# EAGLE board SparkFun_Bluetooth_Beacon_IN100-Panel (EAGLE 9.6.2)
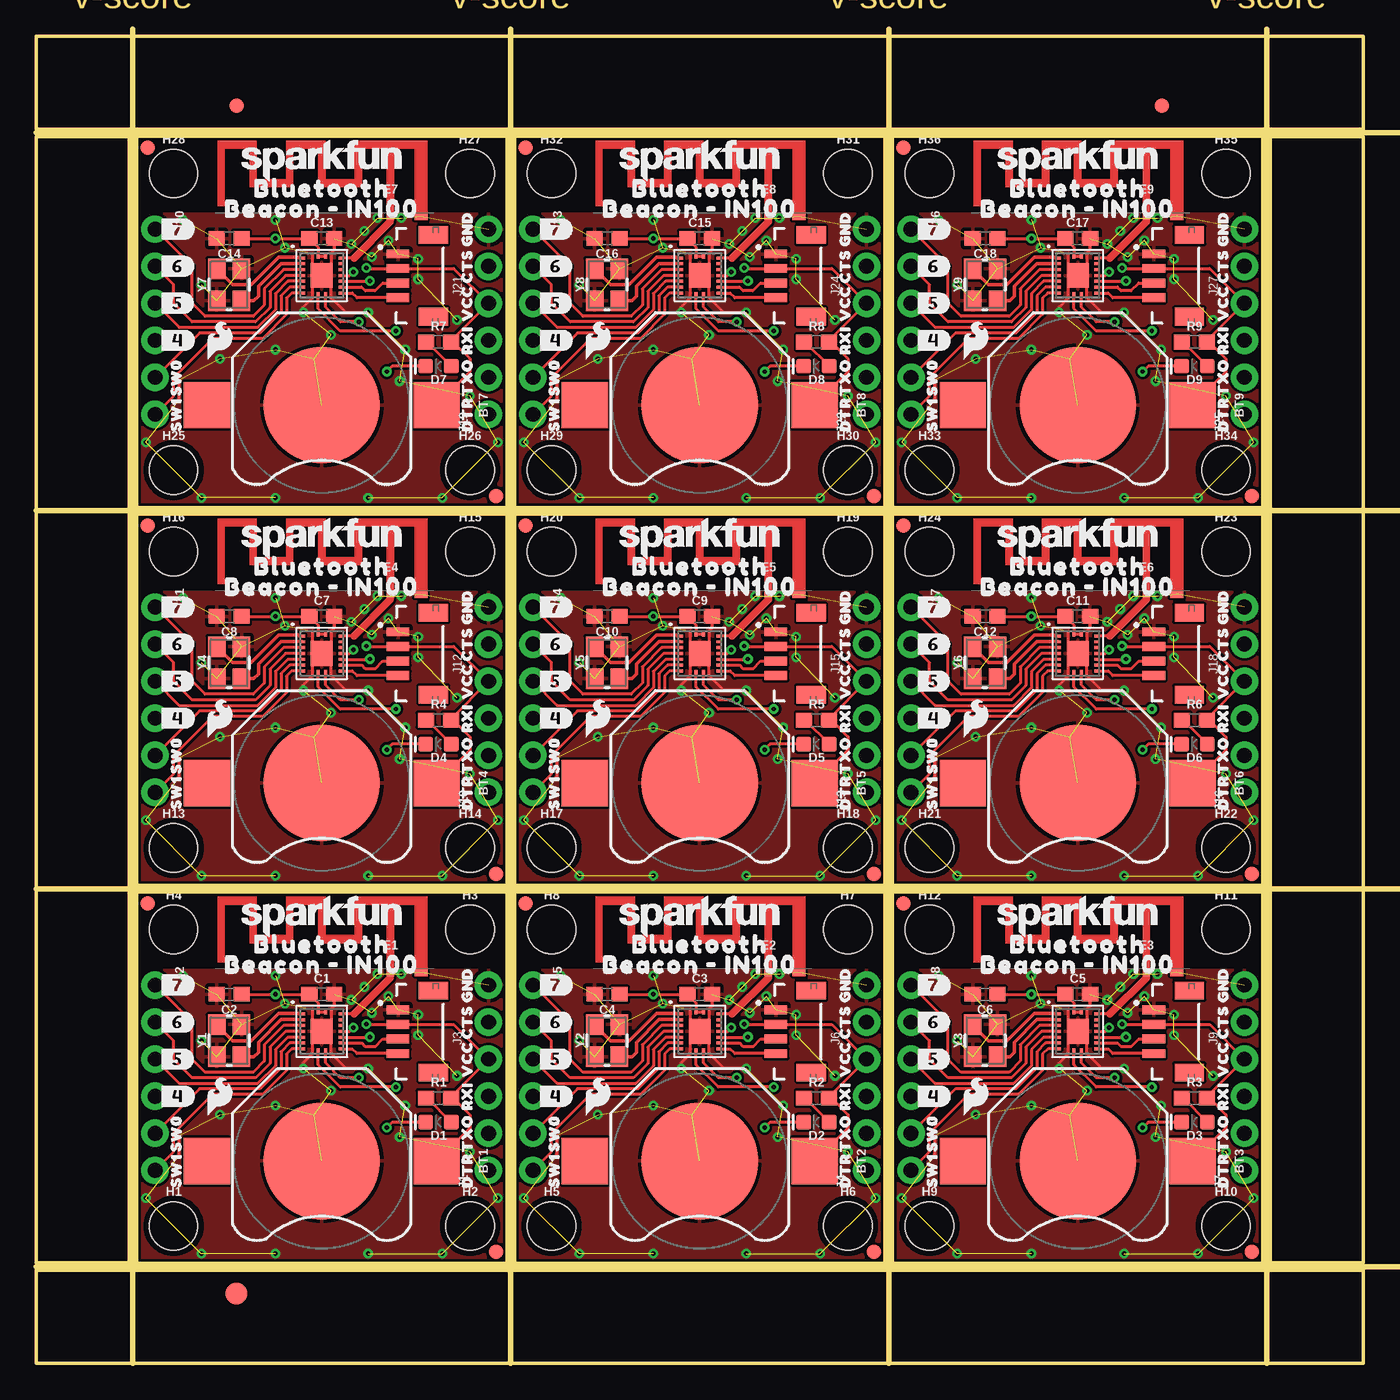
[diagram p0: board, top side]
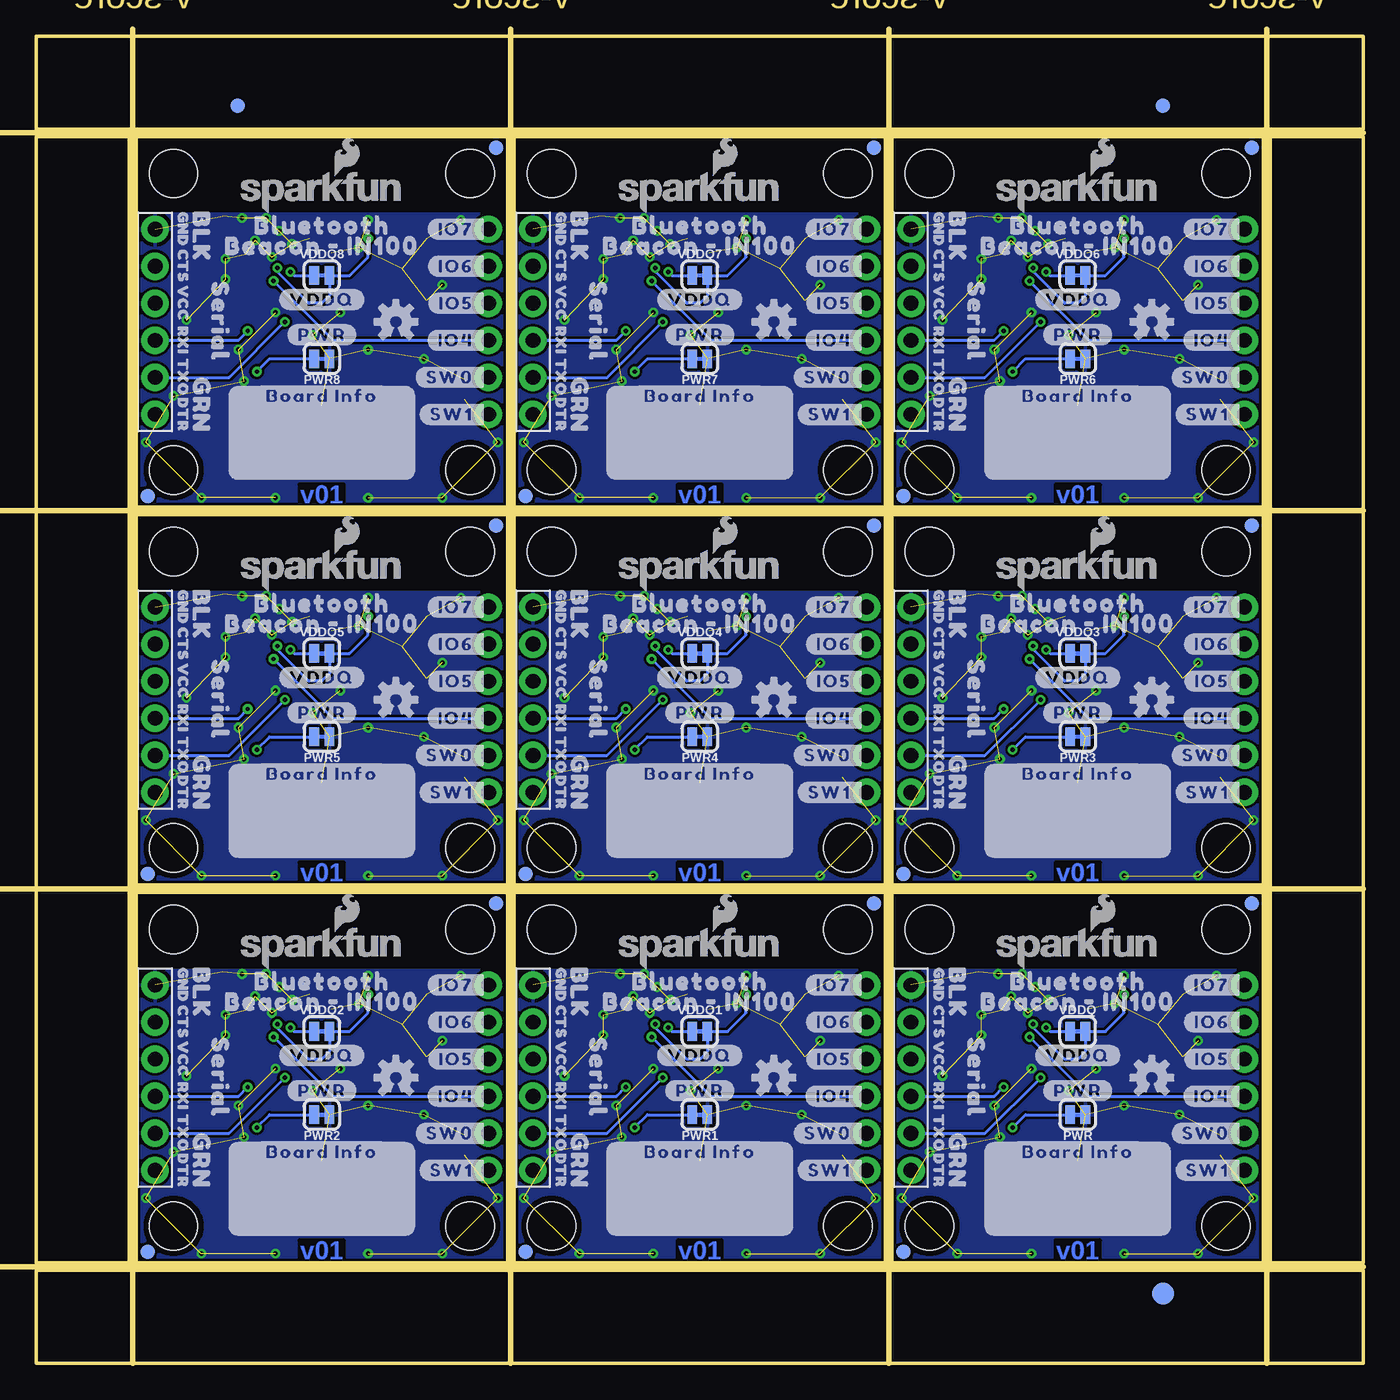
[diagram p1: board, bottom side, seen from below]

Size 90.93 x 90.93 mm. Coordinates in mm from the lower left corner, seen from the top.
Outline: 6.86,6.86 32.26,6.86 32.26,32.26 6.86,32.26 6.86,6.86
Outline: 32.77,6.86 58.17,6.86 58.17,32.26 32.77,32.26 32.77,6.86
Outline: 58.67,6.86 84.07,6.86 84.07,32.26 58.67,32.26 58.67,6.86
Outline: 6.86,32.77 32.26,32.77 32.26,58.17 6.86,58.17 6.86,32.77
Outline: 32.77,32.77 58.17,32.77 58.17,58.17 32.77,58.17 32.77,32.77
Outline: 58.67,32.77 84.07,32.77 84.07,58.17 58.67,58.17 58.67,32.77
Outline: 6.86,58.67 32.26,58.67 32.26,84.07 6.86,84.07 6.86,58.67
Outline: 32.77,58.67 58.17,58.67 58.17,84.07 32.77,84.07 32.77,58.67
Outline: 58.67,58.67 84.07,58.67 84.07,84.07 58.67,84.07 58.67,58.67
Outline: 0,6.35 90.93,6.35 90.93,0 0,0 0,6.35
Outline: 84.58,84.07 90.93,84.07 90.93,6.86 84.58,6.86 84.58,84.07
Outline: 0,90.93 90.93,90.93 90.93,84.58 0,84.58 0,90.93
Outline: 0,84.07 6.35,84.07 6.35,6.86 0,6.86 0,84.07
Copper layers (1*16): Top 0.035mm / dielectric 1.5mm / Bottom 0.035mm
Design rules "SparkFun_Bluetooth_Beacon_IN100": minimum track width 7mil, minimum drill 0.3mm, track to track 7mil, track to pad 7mil, pad to pad 7mil, via to via 7mil, smd to smd 7mil, copper to edge 7mil, drill to drill 7mil, minimum pad ring 7mil, minimum via ring 7mil, stop-mask expansion 3mil, vias tented up to drill 25mil, thermal gap 10mil
Milling: 8 lines

## Footprints (pad centres in the part's own frame; a part is rotated, then mirrored left to right if it is on the bottom)
BATTCON_12MM = smd 8 x 8: GND 0,0 | smd 3.175 x 3.175: PWR@1 -7.874,0; PWR@2 7.874,0
0603 = smd 1.1 x 1: 1 -0.85,0; 2 0.85,0
LED-0603 = smd 1 x 1: A -0.877,0; C 0.877,0
TRACE_ANTENNA_2.4GHZ_15.2MM = smd 0.5 x 0.5: ANT 0,-0.25 | smd 0.9 x 0.5: GND 2.1,-0.25
FIDUCIAL-1X2 = smd 1 x 1: 1 0,0
FIDUCIAL-1.5X3 = smd 1.5 x 1.5: 1 0,0
STAND-OFF = hole 3.302: 0,0
1X06_NO_SILK = drill 1.016 pad 1.88: 1 0,0; 2 2.54,0; 3 5.08,0; 4 7.62,0; 5 10.16,0; 6 12.7,0
JST04_1MM_VERT = smd 0.6 x 1.55: 1 -1.478,0.775; 2 -0.478,0.775; 3 0.522,0.775; 4 1.522,0.775 | smd 1.2 x 2: NC1 -2.778,3.2; NC2 2.822,3.2
SMT-JUMPER_2_NC_TRACE_SILK = smd 0.66 x 1.27: 1 -0.521,0; 2 0.521,0
IN100 = smd 0.35 x 0.2: 1 -1.325,1.2; 2 -1.325,0.8; 3 -1.325,0.4; 4 -1.325,0; 5 -1.325,-0.4; 6 -1.325,-0.8; 7 -1.325,-1.2; 10 1.325,-1.2; 11 1.325,-0.8; 12 1.325,-0.4; 13 1.325,0; 14 1.325,0.4; 15 1.325,0.8; 16 1.325,1.2 | smd 0.2 x 0.35: 8 -0.25,-1.325; 9 0.25,-1.325; 17 0.25,1.325; 18 -0.25,1.325 | smd 1.5 x 1.7: 19 0,0
CRYSTAL-SMD-3.2X2.5MM = smd 1.4 x 1.2: 1 -1.1,-0.85; 2 1.1,-0.85; 3 1.1,0.85; 4 -1.1,0.85

## Placement (x,y rotation side)
BT1  [BATTCON_12MM]  19.56,13.84 180 top
BT2  [BATTCON_12MM]  45.47,13.84 180 top
BT3  [BATTCON_12MM]  71.37,13.84 180 top
BT4  [BATTCON_12MM]  19.56,39.75 180 top
BT5  [BATTCON_12MM]  45.47,39.75 180 top
BT6  [BATTCON_12MM]  71.37,39.75 180 top
BT7  [BATTCON_12MM]  19.56,65.66 180 top
BT8  [BATTCON_12MM]  45.47,65.66 180 top
BT9  [BATTCON_12MM]  71.37,65.66 180 top
C1  0.1uF  [0603]  19.56,25.27 0 top
C2  10uF  [0603]  13.21,25.27 180 top
C3  0.1uF  [0603]  45.47,25.27 0 top
C4  10uF  [0603]  39.12,25.27 180 top
C5  0.1uF  [0603]  71.37,25.27 0 top
C6  10uF  [0603]  65.02,25.27 180 top
C7  0.1uF  [0603]  19.56,51.18 0 top
C8  10uF  [0603]  13.21,51.18 180 top
C9  0.1uF  [0603]  45.47,51.18 0 top
C10  10uF  [0603]  39.12,51.18 180 top
C11  0.1uF  [0603]  71.37,51.18 0 top
C12  10uF  [0603]  65.02,51.18 180 top
C13  0.1uF  [0603]  19.56,77.09 0 top
C14  10uF  [0603]  13.21,77.09 180 top
C15  0.1uF  [0603]  45.47,77.09 0 top
C16  10uF  [0603]  39.12,77.09 180 top
C17  0.1uF  [0603]  71.37,77.09 0 top
C18  10uF  [0603]  65.02,77.09 180 top
D1  RED  [LED-0603]  27.56,16.51 180 top
D2  RED  [LED-0603]  53.47,16.51 180 top
D3  RED  [LED-0603]  79.38,16.51 180 top
D4  RED  [LED-0603]  27.56,42.42 180 top
D5  RED  [LED-0603]  53.47,42.42 180 top
D6  RED  [LED-0603]  79.38,42.42 180 top
D7  RED  [LED-0603]  27.56,68.33 180 top
D8  RED  [LED-0603]  53.47,68.33 180 top
D9  RED  [LED-0603]  79.38,68.33 180 top
E1  ANTENNA-GROUNDEDTRACE-15.2MM  [TRACE_ANTENNA_2.4GHZ_15.2MM]  24.26,27.05 0 top
E2  ANTENNA-GROUNDEDTRACE-15.2MM  [TRACE_ANTENNA_2.4GHZ_15.2MM]  50.16,27.05 0 top
E3  ANTENNA-GROUNDEDTRACE-15.2MM  [TRACE_ANTENNA_2.4GHZ_15.2MM]  76.07,27.05 0 top
E4  ANTENNA-GROUNDEDTRACE-15.2MM  [TRACE_ANTENNA_2.4GHZ_15.2MM]  24.26,52.96 0 top
E5  ANTENNA-GROUNDEDTRACE-15.2MM  [TRACE_ANTENNA_2.4GHZ_15.2MM]  50.16,52.96 0 top
E6  ANTENNA-GROUNDEDTRACE-15.2MM  [TRACE_ANTENNA_2.4GHZ_15.2MM]  76.07,52.96 0 top
E7  ANTENNA-GROUNDEDTRACE-15.2MM  [TRACE_ANTENNA_2.4GHZ_15.2MM]  24.26,78.87 0 top
E8  ANTENNA-GROUNDEDTRACE-15.2MM  [TRACE_ANTENNA_2.4GHZ_15.2MM]  50.16,78.87 0 top
E9  ANTENNA-GROUNDEDTRACE-15.2MM  [TRACE_ANTENNA_2.4GHZ_15.2MM]  76.07,78.87 0 top
E$1  [FIDUCIAL-1X2]  13.72,86.17 0 top
E$2  [FIDUCIAL-1X2]  13.72,86.17 0 bottom
E$3  [FIDUCIAL-1X2]  77.15,86.17 0 top
E$4  [FIDUCIAL-1X2]  77.15,86.17 0 bottom
E$5  [FIDUCIAL-1.5X3]  13.72,4.76 0 top
E$6  [FIDUCIAL-1.5X3]  13.72,4.76 0 bottom
FD1  FIDUCIAL1X2  [FIDUCIAL-1X2]  7.62,31.5 0 bottom
FD2  FIDUCIAL1X2  [FIDUCIAL-1X2]  7.62,31.5 0 top
FD3  FIDUCIAL1X2  [FIDUCIAL-1X2]  31.5,7.62 0 bottom
FD4  FIDUCIAL1X2  [FIDUCIAL-1X2]  31.5,7.62 0 top
FD5  FIDUCIAL1X2  [FIDUCIAL-1X2]  33.53,31.5 0 bottom
FD6  FIDUCIAL1X2  [FIDUCIAL-1X2]  33.53,31.5 0 top
FD7  FIDUCIAL1X2  [FIDUCIAL-1X2]  57.4,7.62 0 bottom
FD8  FIDUCIAL1X2  [FIDUCIAL-1X2]  57.4,7.62 0 top
FD9  FIDUCIAL1X2  [FIDUCIAL-1X2]  59.44,31.5 0 bottom
FD10  FIDUCIAL1X2  [FIDUCIAL-1X2]  59.44,31.5 0 top
FD11  FIDUCIAL1X2  [FIDUCIAL-1X2]  83.31,7.62 0 bottom
FD12  FIDUCIAL1X2  [FIDUCIAL-1X2]  83.31,7.62 0 top
FD13  FIDUCIAL1X2  [FIDUCIAL-1X2]  7.62,57.4 0 bottom
FD14  FIDUCIAL1X2  [FIDUCIAL-1X2]  7.62,57.4 0 top
FD15  FIDUCIAL1X2  [FIDUCIAL-1X2]  31.5,33.53 0 bottom
FD16  FIDUCIAL1X2  [FIDUCIAL-1X2]  31.5,33.53 0 top
FD17  FIDUCIAL1X2  [FIDUCIAL-1X2]  33.53,57.4 0 bottom
FD18  FIDUCIAL1X2  [FIDUCIAL-1X2]  33.53,57.4 0 top
FD19  FIDUCIAL1X2  [FIDUCIAL-1X2]  57.4,33.53 0 bottom
FD20  FIDUCIAL1X2  [FIDUCIAL-1X2]  57.4,33.53 0 top
FD21  FIDUCIAL1X2  [FIDUCIAL-1X2]  59.44,57.4 0 bottom
FD22  FIDUCIAL1X2  [FIDUCIAL-1X2]  59.44,57.4 0 top
FD23  FIDUCIAL1X2  [FIDUCIAL-1X2]  83.31,33.53 0 bottom
FD24  FIDUCIAL1X2  [FIDUCIAL-1X2]  83.31,33.53 0 top
FD25  FIDUCIAL1X2  [FIDUCIAL-1X2]  7.62,83.31 0 bottom
FD26  FIDUCIAL1X2  [FIDUCIAL-1X2]  7.62,83.31 0 top
FD27  FIDUCIAL1X2  [FIDUCIAL-1X2]  31.5,59.44 0 bottom
FD28  FIDUCIAL1X2  [FIDUCIAL-1X2]  31.5,59.44 0 top
FD29  FIDUCIAL1X2  [FIDUCIAL-1X2]  33.53,83.31 0 bottom
FD30  FIDUCIAL1X2  [FIDUCIAL-1X2]  33.53,83.31 0 top
FD31  FIDUCIAL1X2  [FIDUCIAL-1X2]  57.4,59.44 0 bottom
FD32  FIDUCIAL1X2  [FIDUCIAL-1X2]  57.4,59.44 0 top
FD33  FIDUCIAL1X2  [FIDUCIAL-1X2]  59.44,83.31 0 bottom
FD34  FIDUCIAL1X2  [FIDUCIAL-1X2]  59.44,83.31 0 top
FD35  FIDUCIAL1X2  [FIDUCIAL-1X2]  83.31,59.44 0 bottom
FD36  FIDUCIAL1X2  [FIDUCIAL-1X2]  83.31,59.44 0 top
H1  STAND-OFF  [STAND-OFF]  9.4,9.4 0 top
H2  STAND-OFF  [STAND-OFF]  29.72,9.4 0 top
H3  STAND-OFF  [STAND-OFF]  29.72,29.72 0 top
H4  STAND-OFF  [STAND-OFF]  9.4,29.72 0 top
H5  STAND-OFF  [STAND-OFF]  35.31,9.4 0 top
H6  STAND-OFF  [STAND-OFF]  55.63,9.4 0 top
H7  STAND-OFF  [STAND-OFF]  55.63,29.72 0 top
H8  STAND-OFF  [STAND-OFF]  35.31,29.72 0 top
H9  STAND-OFF  [STAND-OFF]  61.21,9.4 0 top
H10  STAND-OFF  [STAND-OFF]  81.53,9.4 0 top
H11  STAND-OFF  [STAND-OFF]  81.53,29.72 0 top
H12  STAND-OFF  [STAND-OFF]  61.21,29.72 0 top
H13  STAND-OFF  [STAND-OFF]  9.4,35.31 0 top
H14  STAND-OFF  [STAND-OFF]  29.72,35.31 0 top
H15  STAND-OFF  [STAND-OFF]  29.72,55.63 0 top
H16  STAND-OFF  [STAND-OFF]  9.4,55.63 0 top
H17  STAND-OFF  [STAND-OFF]  35.31,35.31 0 top
H18  STAND-OFF  [STAND-OFF]  55.63,35.31 0 top
H19  STAND-OFF  [STAND-OFF]  55.63,55.63 0 top
H20  STAND-OFF  [STAND-OFF]  35.31,55.63 0 top
H21  STAND-OFF  [STAND-OFF]  61.21,35.31 0 top
H22  STAND-OFF  [STAND-OFF]  81.53,35.31 0 top
H23  STAND-OFF  [STAND-OFF]  81.53,55.63 0 top
H24  STAND-OFF  [STAND-OFF]  61.21,55.63 0 top
H25  STAND-OFF  [STAND-OFF]  9.4,61.21 0 top
H26  STAND-OFF  [STAND-OFF]  29.72,61.21 0 top
H27  STAND-OFF  [STAND-OFF]  29.72,81.53 0 top
H28  STAND-OFF  [STAND-OFF]  9.4,81.53 0 top
H29  STAND-OFF  [STAND-OFF]  35.31,61.21 0 top
H30  STAND-OFF  [STAND-OFF]  55.63,61.21 0 top
H31  STAND-OFF  [STAND-OFF]  55.63,81.53 0 top
H32  STAND-OFF  [STAND-OFF]  35.31,81.53 0 top
H33  STAND-OFF  [STAND-OFF]  61.21,61.21 0 top
H34  STAND-OFF  [STAND-OFF]  81.53,61.21 0 top
H35  STAND-OFF  [STAND-OFF]  81.53,81.53 0 top
H36  STAND-OFF  [STAND-OFF]  61.21,81.53 0 top
J1  [1X06_NO_SILK]  30.99,13.21 90 top
J2  [1X06_NO_SILK]  8.13,25.91 270 top
J3  Vertical Qwiic Connector  [JST04_1MM_VERT]  24,22.73 270 top
J4  [1X06_NO_SILK]  56.9,13.21 90 top
J5  [1X06_NO_SILK]  34.04,25.91 270 top
J6  Vertical Qwiic Connector  [JST04_1MM_VERT]  49.91,22.73 270 top
J7  [1X06_NO_SILK]  82.8,13.21 90 top
J8  [1X06_NO_SILK]  59.94,25.91 270 top
J9  Vertical Qwiic Connector  [JST04_1MM_VERT]  75.82,22.73 270 top
J10  [1X06_NO_SILK]  30.99,39.12 90 top
J11  [1X06_NO_SILK]  8.13,51.82 270 top
J12  Vertical Qwiic Connector  [JST04_1MM_VERT]  24,48.64 270 top
J13  [1X06_NO_SILK]  56.9,39.12 90 top
J14  [1X06_NO_SILK]  34.04,51.82 270 top
J15  Vertical Qwiic Connector  [JST04_1MM_VERT]  49.91,48.64 270 top
J16  [1X06_NO_SILK]  82.8,39.12 90 top
J17  [1X06_NO_SILK]  59.94,51.82 270 top
J18  Vertical Qwiic Connector  [JST04_1MM_VERT]  75.82,48.64 270 top
J19  [1X06_NO_SILK]  30.99,65.02 90 top
J20  [1X06_NO_SILK]  8.13,77.72 270 top
J21  Vertical Qwiic Connector  [JST04_1MM_VERT]  24,74.55 270 top
J22  [1X06_NO_SILK]  56.9,65.02 90 top
J23  [1X06_NO_SILK]  34.04,77.72 270 top
J24  Vertical Qwiic Connector  [JST04_1MM_VERT]  49.91,74.55 270 top
J25  [1X06_NO_SILK]  82.8,65.02 90 top
J26  [1X06_NO_SILK]  59.94,77.72 270 top
J27  Vertical Qwiic Connector  [JST04_1MM_VERT]  75.82,74.55 270 top
LOGO1  OSHW-LOGOS  [OSHW-LOGO-S]  14.48,19.56 0 bottom
LOGO2  SFE_LOGO_NAME_FLAME.1_INCH  [SFE_LOGO_NAME_FLAME_.1]  19.56,28.45 0 bottom
LOGO3  OSHW-LOGOS  [OSHW-LOGO-S]  40.39,19.56 0 bottom
LOGO4  SFE_LOGO_NAME_FLAME.1_INCH  [SFE_LOGO_NAME_FLAME_.1]  45.47,28.45 0 bottom
LOGO5  OSHW-LOGOS  [OSHW-LOGO-S]  66.29,19.56 0 bottom
LOGO6  SFE_LOGO_NAME_FLAME.1_INCH  [SFE_LOGO_NAME_FLAME_.1]  71.37,28.45 0 bottom
LOGO7  OSHW-LOGOS  [OSHW-LOGO-S]  14.48,45.47 0 bottom
LOGO8  SFE_LOGO_NAME_FLAME.1_INCH  [SFE_LOGO_NAME_FLAME_.1]  19.56,54.36 0 bottom
LOGO9  OSHW-LOGOS  [OSHW-LOGO-S]  40.39,45.47 0 bottom
LOGO10  SFE_LOGO_NAME_FLAME.1_INCH  [SFE_LOGO_NAME_FLAME_.1]  45.47,54.36 0 bottom
LOGO11  OSHW-LOGOS  [OSHW-LOGO-S]  66.29,45.47 0 bottom
LOGO12  SFE_LOGO_NAME_FLAME.1_INCH  [SFE_LOGO_NAME_FLAME_.1]  71.37,54.36 0 bottom
LOGO13  OSHW-LOGOS  [OSHW-LOGO-S]  14.48,71.37 0 bottom
LOGO14  SFE_LOGO_NAME_FLAME.1_INCH  [SFE_LOGO_NAME_FLAME_.1]  19.56,80.26 0 bottom
LOGO15  OSHW-LOGOS  [OSHW-LOGO-S]  40.39,71.37 0 bottom
LOGO16  SFE_LOGO_NAME_FLAME.1_INCH  [SFE_LOGO_NAME_FLAME_.1]  45.47,80.26 0 bottom
LOGO17  OSHW-LOGOS  [OSHW-LOGO-S]  66.29,71.37 0 bottom
LOGO18  SFE_LOGO_NAME_FLAME.1_INCH  [SFE_LOGO_NAME_FLAME_.1]  71.37,80.26 0 bottom
PWR  JUMPER-SMT_2_NC_TRACE_SILK  [SMT-JUMPER_2_NC_TRACE_SILK]  19.56,17.02 180 bottom
PWR1  JUMPER-SMT_2_NC_TRACE_SILK  [SMT-JUMPER_2_NC_TRACE_SILK]  45.47,17.02 180 bottom
PWR2  JUMPER-SMT_2_NC_TRACE_SILK  [SMT-JUMPER_2_NC_TRACE_SILK]  71.37,17.02 180 bottom
PWR3  JUMPER-SMT_2_NC_TRACE_SILK  [SMT-JUMPER_2_NC_TRACE_SILK]  19.56,42.93 180 bottom
PWR4  JUMPER-SMT_2_NC_TRACE_SILK  [SMT-JUMPER_2_NC_TRACE_SILK]  45.47,42.93 180 bottom
PWR5  JUMPER-SMT_2_NC_TRACE_SILK  [SMT-JUMPER_2_NC_TRACE_SILK]  71.37,42.93 180 bottom
PWR6  JUMPER-SMT_2_NC_TRACE_SILK  [SMT-JUMPER_2_NC_TRACE_SILK]  19.56,68.83 180 bottom
PWR7  JUMPER-SMT_2_NC_TRACE_SILK  [SMT-JUMPER_2_NC_TRACE_SILK]  45.47,68.83 180 bottom
PWR8  JUMPER-SMT_2_NC_TRACE_SILK  [SMT-JUMPER_2_NC_TRACE_SILK]  71.37,68.83 180 bottom
R1  1k  [0603]  27.56,18.16 0 top
R2  1k  [0603]  53.47,18.16 0 top
R3  1k  [0603]  79.38,18.16 0 top
R4  1k  [0603]  27.56,44.07 0 top
R5  1k  [0603]  53.47,44.07 0 top
R6  1k  [0603]  79.38,44.07 0 top
R7  1k  [0603]  27.56,69.98 0 top
R8  1k  [0603]  53.47,69.98 0 top
R9  1k  [0603]  79.38,69.98 0 top
U1  IN100  [IN100]  19.56,22.73 0 top
U2  IN100  [IN100]  45.47,22.73 0 top
U3  IN100  [IN100]  71.37,22.73 0 top
U4  IN100  [IN100]  19.56,48.64 0 top
U5  IN100  [IN100]  45.47,48.64 0 top
U6  IN100  [IN100]  71.37,48.64 0 top
U7  IN100  [IN100]  19.56,74.55 0 top
U8  IN100  [IN100]  45.47,74.55 0 top
U9  IN100  [IN100]  71.37,74.55 0 top
U$1  [BLUETOOTH0]  19.56,28.7 0 top
U$2  [#_7#0]  8.25,25.91 0 top
U$3  [#_6#0]  8.25,23.37 0 top
U$4  [SFE_LOGO_NAME_.1]  19.56,30.61 0 top
U$5  [BEACON_#_IN1000]  19.56,27.3 0 top
U$6  [#_5#0]  8.25,20.83 0 top
U$7  [#_4#0]  8.25,18.29 0 top
U$8  [SFE_LOGO_FLAME_.1]  12.57,18.29 0 top
U$9  [BLUETOOTH0]  19.56,26.16 0 bottom
U$10  [BEACON_#_IN1000]  19.56,24.77 0 bottom
U$11  [#VDDQ#0]  19.56,21.08 0 bottom
U$12  [SERIAL0]  26.54,19.56 270 bottom
U$13  [#IO7_#0]  8.13,25.91 0 bottom
U$14  [#IO6_#0]  8.13,23.37 0 bottom
U$15  [#IO5_#0]  8.13,20.83 0 bottom
U$16  [#IO4_#0]  8.13,18.29 0 bottom
U$17  [#SW0_#0]  8.13,15.75 0 bottom
U$18  [#SW1_#0]  8.13,13.21 0 bottom
U$19  [#PWR#0]  19.56,18.67 0 bottom
U$20  [BLUETOOTH0]  45.47,28.7 0 top
U$21  [SW00]  9.59,15.75 90 top
U$22  [SW10]  9.59,13.21 90 top
U$23  [#BOARD_INFO#0]  19.56,14.48 0 bottom
U$24  [SFE_LOGO_NAME_.1]  45.47,30.61 0 top
U$25  [BEACON_#_IN1000]  45.47,27.3 0 top
U$26  [#_7#0]  34.16,25.91 0 top
U$27  [#_6#0]  34.16,23.37 0 top
U$28  [#_5#0]  34.16,20.83 0 top
U$29  [#_4#0]  34.16,18.29 0 top
U$30  [SFE_LOGO_FLAME_.1]  38.48,18.29 0 top
U$31  [BLUETOOTH0]  45.47,26.16 0 bottom
U$32  [BEACON_#_IN1000]  45.47,24.77 0 bottom
U$33  [#VDDQ#0]  45.47,21.08 0 bottom
U$34  [SERIAL0]  52.45,19.56 270 bottom
U$35  [#IO7_#0]  34.04,25.91 0 bottom
U$36  [#IO6_#0]  34.04,23.37 0 bottom
U$37  [#IO5_#0]  34.04,20.83 0 bottom
U$38  [#IO4_#0]  34.04,18.29 0 bottom
U$39  [#SW0_#0]  34.04,15.75 0 bottom
U$40  [#SW1_#0]  34.04,13.21 0 bottom
U$41  [#PWR#0]  45.47,18.67 0 bottom
U$42  [SW00]  35.5,15.75 90 top
U$43  [SW10]  35.5,13.21 90 top
U$44  [#BOARD_INFO#0]  45.47,14.48 0 bottom
U$45  [BLUETOOTH0]  71.37,28.7 0 top
U$46  [SFE_LOGO_NAME_.1]  71.37,30.61 0 top
U$47  [BEACON_#_IN1000]  71.37,27.3 0 top
U$48  [#_7#0]  60.07,25.91 0 top
U$49  [#_6#0]  60.07,23.37 0 top
U$50  [#_5#0]  60.07,20.83 0 top
U$51  [#_4#0]  60.07,18.29 0 top
U$52  [SFE_LOGO_FLAME_.1]  64.39,18.29 0 top
U$53  [BLUETOOTH0]  71.37,26.16 0 bottom
U$54  [BEACON_#_IN1000]  71.37,24.77 0 bottom
U$55  [#VDDQ#0]  71.37,21.08 0 bottom
U$56  [SERIAL0]  78.36,19.56 270 bottom
U$57  [#IO7_#0]  59.94,25.91 0 bottom
U$58  [#IO6_#0]  59.94,23.37 0 bottom
U$59  [#IO5_#0]  59.94,20.83 0 bottom
U$60  [#IO4_#0]  59.94,18.29 0 bottom
U$61  [#SW0_#0]  59.94,15.75 0 bottom
U$62  [#SW1_#0]  59.94,13.21 0 bottom
U$63  [#PWR#0]  71.37,18.67 0 bottom
U$64  [SW00]  61.4,15.75 90 top
U$65  [SW10]  61.4,13.21 90 top
U$66  [#BOARD_INFO#0]  71.37,14.48 0 bottom
U$67  [BLUETOOTH0]  19.56,54.61 0 top
U$68  [SFE_LOGO_NAME_.1]  19.56,56.51 0 top
U$69  [BEACON_#_IN1000]  19.56,53.21 0 top
U$70  [#_7#0]  8.25,51.82 0 top
U$71  [#_6#0]  8.25,49.28 0 top
U$72  [#_5#0]  8.25,46.74 0 top
U$73  [#_4#0]  8.25,44.2 0 top
U$74  [SFE_LOGO_FLAME_.1]  12.57,44.2 0 top
U$75  [BLUETOOTH0]  19.56,52.07 0 bottom
U$76  [BEACON_#_IN1000]  19.56,50.67 0 bottom
U$77  [#VDDQ#0]  19.56,46.99 0 bottom
U$78  [SERIAL0]  26.54,45.47 270 bottom
U$79  [#IO7_#0]  8.13,51.82 0 bottom
U$80  [#IO6_#0]  8.13,49.28 0 bottom
U$81  [#IO5_#0]  8.13,46.74 0 bottom
U$82  [#IO4_#0]  8.13,44.2 0 bottom
U$83  [#SW0_#0]  8.13,41.66 0 bottom
U$84  [#SW1_#0]  8.13,39.12 0 bottom
U$85  [#PWR#0]  19.56,44.58 0 bottom
U$86  [SW00]  9.59,41.66 90 top
U$87  [SW10]  9.59,39.12 90 top
U$88  [#BOARD_INFO#0]  19.56,40.39 0 bottom
U$89  [BLUETOOTH0]  45.47,54.61 0 top
U$90  [SFE_LOGO_NAME_.1]  45.47,56.51 0 top
U$91  [BEACON_#_IN1000]  45.47,53.21 0 top
U$92  [#_7#0]  34.16,51.82 0 top
U$93  [#_6#0]  34.16,49.28 0 top
U$94  [#_5#0]  34.16,46.74 0 top
U$95  [#_4#0]  34.16,44.2 0 top
U$96  [SFE_LOGO_FLAME_.1]  38.48,44.2 0 top
U$97  [BLUETOOTH0]  45.47,52.07 0 bottom
U$98  [BEACON_#_IN1000]  45.47,50.67 0 bottom
U$99  [#VDDQ#0]  45.47,46.99 0 bottom
U$100  [SERIAL0]  52.45,45.47 270 bottom
U$101  [#IO7_#0]  34.04,51.82 0 bottom
U$102  [#IO6_#0]  34.04,49.28 0 bottom
U$103  [#IO5_#0]  34.04,46.74 0 bottom
U$104  [#IO4_#0]  34.04,44.2 0 bottom
U$105  [#SW0_#0]  34.04,41.66 0 bottom
U$106  [#SW1_#0]  34.04,39.12 0 bottom
U$107  [#PWR#0]  45.47,44.58 0 bottom
U$108  [SW00]  35.5,41.66 90 top
U$109  [SW10]  35.5,39.12 90 top
U$110  [#BOARD_INFO#0]  45.47,40.39 0 bottom
U$111  [BLUETOOTH0]  71.37,54.61 0 top
U$112  [SFE_LOGO_NAME_.1]  71.37,56.51 0 top
U$113  [BEACON_#_IN1000]  71.37,53.21 0 top
U$114  [#_7#0]  60.07,51.82 0 top
U$115  [#_6#0]  60.07,49.28 0 top
U$116  [#_5#0]  60.07,46.74 0 top
U$117  [#_4#0]  60.07,44.2 0 top
U$118  [SFE_LOGO_FLAME_.1]  64.39,44.2 0 top
U$119  [BLUETOOTH0]  71.37,52.07 0 bottom
U$120  [BEACON_#_IN1000]  71.37,50.67 0 bottom
U$121  [#VDDQ#0]  71.37,46.99 0 bottom
U$122  [SERIAL0]  78.36,45.47 270 bottom
U$123  [#IO7_#0]  59.94,51.82 0 bottom
U$124  [#IO6_#0]  59.94,49.28 0 bottom
U$125  [#IO5_#0]  59.94,46.74 0 bottom
U$126  [#IO4_#0]  59.94,44.2 0 bottom
U$127  [#SW0_#0]  59.94,41.66 0 bottom
U$128  [#SW1_#0]  59.94,39.12 0 bottom
U$129  [#PWR#0]  71.37,44.58 0 bottom
U$130  [SW00]  61.4,41.66 90 top
U$131  [SW10]  61.4,39.12 90 top
U$132  [#BOARD_INFO#0]  71.37,40.39 0 bottom
U$133  [BLUETOOTH0]  19.56,80.52 0 top
U$134  [SFE_LOGO_NAME_.1]  19.56,82.42 0 top
U$135  [BEACON_#_IN1000]  19.56,79.12 0 top
U$136  [#_7#0]  8.25,77.72 0 top
U$137  [#_6#0]  8.25,75.18 0 top
U$138  [#_5#0]  8.25,72.64 0 top
U$139  [#_4#0]  8.25,70.1 0 top
U$140  [SFE_LOGO_FLAME_.1]  12.57,70.1 0 top
U$141  [BLUETOOTH0]  19.56,77.98 0 bottom
U$142  [BEACON_#_IN1000]  19.56,76.58 0 bottom
U$143  [#VDDQ#0]  19.56,72.9 0 bottom
U$144  [SERIAL0]  26.54,71.37 270 bottom
U$145  [#IO7_#0]  8.13,77.72 0 bottom
U$146  [#IO6_#0]  8.13,75.18 0 bottom
U$147  [#IO5_#0]  8.13,72.64 0 bottom
U$148  [#IO4_#0]  8.13,70.1 0 bottom
U$149  [#SW0_#0]  8.13,67.56 0 bottom
U$150  [#SW1_#0]  8.13,65.02 0 bottom
U$151  [#PWR#0]  19.56,70.48 0 bottom
U$152  [SW00]  9.59,67.56 90 top
U$153  [SW10]  9.59,65.02 90 top
U$154  [#BOARD_INFO#0]  19.56,66.29 0 bottom
U$155  [BLUETOOTH0]  45.47,80.52 0 top
U$156  [SFE_LOGO_NAME_.1]  45.47,82.42 0 top
U$157  [BEACON_#_IN1000]  45.47,79.12 0 top
U$158  [#_7#0]  34.16,77.72 0 top
U$159  [#_6#0]  34.16,75.18 0 top
U$160  [#_5#0]  34.16,72.64 0 top
U$161  [#_4#0]  34.16,70.1 0 top
U$162  [SFE_LOGO_FLAME_.1]  38.48,70.1 0 top
U$163  [BLUETOOTH0]  45.47,77.98 0 bottom
U$164  [BEACON_#_IN1000]  45.47,76.58 0 bottom
U$165  [#VDDQ#0]  45.47,72.9 0 bottom
U$166  [SERIAL0]  52.45,71.37 270 bottom
U$167  [#IO7_#0]  34.04,77.72 0 bottom
U$168  [#IO6_#0]  34.04,75.18 0 bottom
U$169  [#IO5_#0]  34.04,72.64 0 bottom
U$170  [#IO4_#0]  34.04,70.1 0 bottom
U$171  [#SW0_#0]  34.04,67.56 0 bottom
U$172  [#SW1_#0]  34.04,65.02 0 bottom
U$173  [#PWR#0]  45.47,70.48 0 bottom
U$174  [SW00]  35.5,67.56 90 top
U$175  [SW10]  35.5,65.02 90 top
U$176  [#BOARD_INFO#0]  45.47,66.29 0 bottom
U$177  [BLUETOOTH0]  71.37,80.52 0 top
U$178  [SFE_LOGO_NAME_.1]  71.37,82.42 0 top
U$179  [BEACON_#_IN1000]  71.37,79.12 0 top
U$180  [#_7#0]  60.07,77.72 0 top
U$181  [#_6#0]  60.07,75.18 0 top
U$182  [#_5#0]  60.07,72.64 0 top
U$183  [#_4#0]  60.07,70.1 0 top
U$184  [SFE_LOGO_FLAME_.1]  64.39,70.1 0 top
U$185  [BLUETOOTH0]  71.37,77.98 0 bottom
U$186  [BEACON_#_IN1000]  71.37,76.58 0 bottom
U$187  [#VDDQ#0]  71.37,72.9 0 bottom
U$188  [SERIAL0]  78.36,71.37 270 bottom
U$189  [#IO7_#0]  59.94,77.72 0 bottom
U$190  [#IO6_#0]  59.94,75.18 0 bottom
U$191  [#IO5_#0]  59.94,72.64 0 bottom
U$192  [#IO4_#0]  59.94,70.1 0 bottom
U$193  [#SW0_#0]  59.94,67.56 0 bottom
U$194  [#SW1_#0]  59.94,65.02 0 bottom
U$195  [#PWR#0]  71.37,70.48 0 bottom
U$196  [SW00]  61.4,67.56 90 top
U$197  [SW10]  61.4,65.02 90 top
U$198  [#BOARD_INFO#0]  71.37,66.29 0 bottom
VDDQ  JUMPER-SMT_2_NC_TRACE_SILK  [SMT-JUMPER_2_NC_TRACE_SILK]  19.56,22.73 0 bottom
VDDQ1  JUMPER-SMT_2_NC_TRACE_SILK  [SMT-JUMPER_2_NC_TRACE_SILK]  45.47,22.73 0 bottom
VDDQ2  JUMPER-SMT_2_NC_TRACE_SILK  [SMT-JUMPER_2_NC_TRACE_SILK]  71.37,22.73 0 bottom
VDDQ3  JUMPER-SMT_2_NC_TRACE_SILK  [SMT-JUMPER_2_NC_TRACE_SILK]  19.56,48.64 0 bottom
VDDQ4  JUMPER-SMT_2_NC_TRACE_SILK  [SMT-JUMPER_2_NC_TRACE_SILK]  45.47,48.64 0 bottom
VDDQ5  JUMPER-SMT_2_NC_TRACE_SILK  [SMT-JUMPER_2_NC_TRACE_SILK]  71.37,48.64 0 bottom
VDDQ6  JUMPER-SMT_2_NC_TRACE_SILK  [SMT-JUMPER_2_NC_TRACE_SILK]  19.56,74.55 0 bottom
VDDQ7  JUMPER-SMT_2_NC_TRACE_SILK  [SMT-JUMPER_2_NC_TRACE_SILK]  45.47,74.55 0 bottom
VDDQ8  JUMPER-SMT_2_NC_TRACE_SILK  [SMT-JUMPER_2_NC_TRACE_SILK]  71.37,74.55 0 bottom
Y1  CRYSTAL-26MHZSMD-3.2X2.5  [CRYSTAL-SMD-3.2X2.5MM]  13.21,22.1 90 top
Y2  CRYSTAL-26MHZSMD-3.2X2.5  [CRYSTAL-SMD-3.2X2.5MM]  39.12,22.1 90 top
Y3  CRYSTAL-26MHZSMD-3.2X2.5  [CRYSTAL-SMD-3.2X2.5MM]  65.02,22.1 90 top
Y4  CRYSTAL-26MHZSMD-3.2X2.5  [CRYSTAL-SMD-3.2X2.5MM]  13.21,48.01 90 top
Y5  CRYSTAL-26MHZSMD-3.2X2.5  [CRYSTAL-SMD-3.2X2.5MM]  39.12,48.01 90 top
Y6  CRYSTAL-26MHZSMD-3.2X2.5  [CRYSTAL-SMD-3.2X2.5MM]  65.02,48.01 90 top
Y7  CRYSTAL-26MHZSMD-3.2X2.5  [CRYSTAL-SMD-3.2X2.5MM]  13.21,73.91 90 top
Y8  CRYSTAL-26MHZSMD-3.2X2.5  [CRYSTAL-SMD-3.2X2.5MM]  39.12,73.91 90 top
Y9  CRYSTAL-26MHZSMD-3.2X2.5  [CRYSTAL-SMD-3.2X2.5MM]  65.02,73.91 90 top

## Library data of the parts
BT1-BT9 = SparkFun-Batteries; PROD_ID: BATT-08044; SF_SKU: PRT-10592
C1 C3 C5 C7 C9 C11 C13 C15 C17 = SparkFun-Capacitors; PROD_ID: CAP-00810
C2 C4 C6 C8 C10 C12 C14 C16 C18 = SparkFun-Capacitors; PROD_ID: CAP-11015
D1-D9 = SparkFun-LED; PROD_ID: DIO-00819
E1-E9 = SparkFun-RF
E$1-E$4 FD1-FD36 LOGO1-LOGO18 U$4 U$8 U$24 U$30 U$46 U$52 U$68 U$74 U$90 U$96 U$112 U$118 U$134 U$140 U$156 U$162 U$178 U$184 = SparkFun-Aesthetics
E$5 E$6 = SparkFun-Retired
H1-H36 = SparkFun-Hardware
J1 J2 J4 J5 J7 J8 J10 J11 J13 J14 J16 J17 J19 J20 J22 J23 J25 J26 = SparkFun-Connectors
J3 J6 J9 J12 J15 J18 J21 J24 J27 = SparkFun-Connectors; PROD_ID: CONN-14483
PWR PWR1-PWR8 VDDQ VDDQ1-VDDQ8 = SparkFun-Jumpers
R1-R9 = SparkFun-Resistors; PROD_ID: RES-07856
U1-U9 = IN100
U$1-U$3 U$5-U$7 U$9-U$23 U$25-U$29 U$31-U$45 U$47-U$51 U$53-U$67 U$69-U$73 U$75-U$89 U$91-U$95 U$97-U$111 U$113-U$117 U$119-U$133 U$135-U$139 U$141-U$155 U$157-U$161 U$163-U$177 U$179-U$183 U$185-U$198 = output
Y1-Y9 = SparkFun-Clocks; PROD_ID: XTAL-12454

## Nets
GND: BT1.GND C1.2 C2.2 E1.GND J1.6 J3.1 PWR.1 U1.19 Y1.2 Y1.4
GND1: BT2.GND C3.2 C4.2 E2.GND J4.6 J6.1 PWR1.1 U2.19 Y2.2 Y2.4
GND2: BT3.GND C5.2 C6.2 E3.GND J7.6 J9.1 PWR2.1 U3.19 Y3.2 Y3.4
GND3: BT4.GND C7.2 C8.2 E4.GND J10.6 J12.1 PWR3.1 U4.19 Y4.2 Y4.4
GND4: BT5.GND C9.2 C10.2 E5.GND J13.6 J15.1 PWR4.1 U5.19 Y5.2 Y5.4
GND5: BT6.GND C11.2 C12.2 E6.GND J16.6 J18.1 PWR5.1 U6.19 Y6.2 Y6.4
GND6: BT7.GND C13.2 C14.2 E7.GND J19.6 J21.1 PWR6.1 U7.19 Y7.2 Y7.4
GND7: BT8.GND C15.2 C16.2 E8.GND J22.6 J24.1 PWR7.1 U8.19 Y8.2 Y8.4
GND8: BT9.GND C17.2 C18.2 E9.GND J25.6 J27.1 PWR8.1 U9.19 Y9.2 Y9.4
IO1: J5.4 U2.12
IO2: J5.3 U2.5
IO3: J5.2 U2.4
IO4: J2.4 U1.12
IO5: J2.3 U1.5
IO6: J2.2 U1.4
IO7: J2.1 U1.3
IO8: J5.1 U2.3
IO9: J8.4 U3.12
IO10: J8.3 U3.5
IO11: J8.2 U3.4
IO12: J8.1 U3.3
IO13: J11.4 U4.12
IO14: J11.3 U4.5
IO15: J11.2 U4.4
IO16: J11.1 U4.3
IO17: J14.4 U5.12
IO18: J14.3 U5.5
IO19: J14.2 U5.4
IO20: J14.1 U5.3
IO21: J17.4 U6.12
IO22: J17.3 U6.5
IO23: J17.2 U6.4
IO24: J17.1 U6.3
IO25: J20.4 U7.12
IO26: J20.3 U7.5
IO27: J20.2 U7.4
IO28: J20.1 U7.3
IO29: J23.4 U8.12
IO30: J23.3 U8.5
IO31: J23.2 U8.4
IO32: J23.1 U8.3
IO33: J26.4 U9.12
IO34: J26.3 U9.5
IO35: J26.2 U9.4
IO36: J26.1 U9.3
N$1: U1.1 Y1.3
N$2: U1.2 Y1.1
N$3: U1.13 VDDQ.1
N$4: E1.ANT U1.16
N$5: D1.C PWR.2
N$6: D1.A R1.1
N$7: E2.ANT U2.16
N$8: U2.1 Y2.3
N$9: U2.2 Y2.1
N$10: U2.13 VDDQ1.1
N$11: D2.C PWR1.2
N$12: D2.A R2.1
N$13: E3.ANT U3.16
N$14: U3.1 Y3.3
N$15: U3.2 Y3.1
N$16: U3.13 VDDQ2.1
N$17: D3.C PWR2.2
N$18: D3.A R3.1
N$19: E4.ANT U4.16
N$20: U4.1 Y4.3
N$21: U4.2 Y4.1
N$22: U4.13 VDDQ3.1
N$23: D4.C PWR3.2
N$24: D4.A R4.1
N$25: E5.ANT U5.16
N$26: U5.1 Y5.3
N$27: U5.2 Y5.1
N$28: U5.13 VDDQ4.1
N$29: D5.C PWR4.2
N$30: D5.A R5.1
N$31: E6.ANT U6.16
N$32: U6.1 Y6.3
N$33: U6.2 Y6.1
N$34: U6.13 VDDQ5.1
N$35: D6.C PWR5.2
N$36: D6.A R6.1
N$37: E7.ANT U7.16
N$38: U7.1 Y7.3
N$39: U7.2 Y7.1
N$40: U7.13 VDDQ6.1
N$41: D7.C PWR6.2
N$42: D7.A R7.1
N$43: E8.ANT U8.16
N$44: U8.1 Y8.3
N$45: U8.2 Y8.1
N$46: U8.13 VDDQ7.1
N$47: D8.C PWR7.2
N$48: D8.A R8.1
N$49: E9.ANT U9.16
N$50: U9.1 Y9.3
N$51: U9.2 Y9.1
N$52: U9.13 VDDQ8.1
N$53: D9.C PWR8.2
N$54: D9.A R9.1
RX/IO0: J1.3 U1.8
RX/IO1: J4.3 U2.8
RX/IO2: J7.3 U3.8
RX/IO3: J10.3 U4.8
RX/IO4: J13.3 U5.8
RX/IO5: J16.3 U6.8
RX/IO6: J19.3 U7.8
RX/IO7: J22.3 U8.8
RX/IO8: J25.3 U9.8
SCL/IO1: J6.4 U2.10
SCL/IO2: J3.4 U1.10
SCL/IO3: J9.4 U3.10
SCL/IO4: J12.4 U4.10
SCL/IO5: J15.4 U5.10
SCL/IO6: J18.4 U6.10
SCL/IO7: J21.4 U7.10
SCL/IO8: J24.4 U8.10
SCL/IO9: J27.4 U9.10
SDA/IO1: J6.3 U2.11
SDA/IO2: J9.3 U3.11
SDA/IO3: J3.3 U1.11
SDA/IO4: J12.3 U4.11
SDA/IO5: J15.3 U5.11
SDA/IO6: J18.3 U6.11
SDA/IO7: J21.3 U7.11
SDA/IO8: J24.3 U8.11
SDA/IO9: J27.3 U9.11
SW0: J2.5 U1.6
SW1: J2.6 U1.7
SW2: J5.5 U2.6
SW3: J5.6 U2.7
SW4: J8.5 U3.6
SW5: J8.6 U3.7
SW6: J11.5 U4.6
SW7: J11.6 U4.7
SW8: J14.5 U5.6
SW9: J14.6 U5.7
SW10: J17.5 U6.6
SW11: J17.6 U6.7
SW12: J20.5 U7.6
SW13: J20.6 U7.7
SW14: J23.5 U8.6
SW15: J23.6 U8.7
SW16: J26.5 U9.6
SW17: J26.6 U9.7
TX/IO1: J1.2 U1.9
TX/IO2: J4.2 U2.9
TX/IO3: J7.2 U3.9
TX/IO4: J10.2 U4.9
TX/IO5: J13.2 U5.9
TX/IO6: J16.2 U6.9
TX/IO7: J19.2 U7.9
TX/IO8: J22.2 U8.9
TX/IO9: J25.2 U9.9
VCC: BT1.PWR@1 C1.1 C2.1 J1.4 J3.2 R1.2 U1.17 U1.18 VDDQ.2
VCC1: BT2.PWR@1 C3.1 C4.1 J4.4 J6.2 R2.2 U2.17 U2.18 VDDQ1.2
VCC2: BT3.PWR@1 C5.1 C6.1 J7.4 J9.2 R3.2 U3.17 U3.18 VDDQ2.2
VCC3: BT4.PWR@1 C7.1 C8.1 J10.4 J12.2 R4.2 U4.17 U4.18 VDDQ3.2
VCC4: BT5.PWR@1 C9.1 C10.1 J13.4 J15.2 R5.2 U5.17 U5.18 VDDQ4.2
VCC5: BT6.PWR@1 C11.1 C12.1 J16.4 J18.2 R6.2 U6.17 U6.18 VDDQ5.2
VCC6: BT7.PWR@1 C13.1 C14.1 J19.4 J21.2 R7.2 U7.17 U7.18 VDDQ6.2
VCC7: BT8.PWR@1 C15.1 C16.1 J22.4 J24.2 R8.2 U8.17 U8.18 VDDQ7.2
VCC8: BT9.PWR@1 C17.1 C18.1 J25.4 J27.2 R9.2 U9.17 U9.18 VDDQ8.2

## Tracks (layer width: path | path; a pad name or v marks a point on that pad's centre or on a via)
GND  (via drill 0.3)  (34 unrouted)
  Top 0.203: U1.19 20.19,23.37 20.19,24.26 20.41,24.47 C1.2 | U1.19 18.92,23.37 18.92,24.26 | U1.19 18.92,22.1 18.92,21.21 18.29,20.57 v18.29,20.19 | U1.19 20.19,22.1 20.19,21.21 21.21,20.19 v22.73,20.19 | 9.78,14.22 9.78,15.59
  other vias: 10.03,26.54 23.37,26.67 16.38,26.54 22.99,24 28.83,19.68 25.27,17.65 17.02,24.64 11.3,7.49 27.81,7.49 31.62,11.3 16.38,7.49 22.73,7.49 29.72,14.48 26.16,22.48 25.02,26.67 24.89,15.49 26.16,23.88 11.3,22.1 12.57,17.02 20.19,18.67 16.38,17.65 21.59,24.89 24.13,25.15 22.48,25.78 7.49,11.3
  pour Top (isolate 0.127): 6.86,6.86 32.26,6.86 32.26,26.92 6.86,26.92
  pour Bottom (isolate 0.127): 32.26,6.86 6.86,6.86 6.86,26.92 32.26,26.92
GND1  (via drill 0.3)  (34 unrouted)
  Top 0.203: U2.19 46.1,23.37 46.1,24.26 46.32,24.47 C3.2 | U2.19 44.83,23.37 44.83,24.26 | U2.19 44.83,22.1 44.83,21.21 44.2,20.57 v44.2,20.19 | U2.19 46.1,22.1 46.1,21.21 47.12,20.19 v48.64,20.19 | 35.69,14.22 35.69,15.59
  other vias: 35.94,26.54 49.28,26.67 42.29,26.54 48.89,24 54.74,19.68 51.18,17.65 42.93,24.64 37.21,7.49 53.72,7.49 57.53,11.3 42.29,7.49 48.64,7.49 55.63,14.48 52.07,22.48 50.93,26.67 50.8,15.49 52.07,23.88 37.21,22.1 38.48,17.02 46.1,18.67 42.29,17.65 47.5,24.89 50.04,25.15 48.39,25.78 33.4,11.3
  pour Top (isolate 0.127): 32.77,6.86 58.17,6.86 58.17,26.92 32.77,26.92
  pour Bottom (isolate 0.127): 58.17,6.86 32.77,6.86 32.77,26.92 58.17,26.92
GND2  (via drill 0.3)  (34 unrouted)
  Top 0.203: U3.19 72.01,23.37 72.01,24.26 72.22,24.47 C5.2 | U3.19 70.74,23.37 70.74,24.26 | U3.19 70.74,22.1 70.74,21.21 70.1,20.57 v70.1,20.19 | U3.19 72.01,22.1 72.01,21.21 73.03,20.19 v74.55,20.19 | 61.59,14.22 61.59,15.59
  other vias: 61.85,26.54 75.18,26.67 68.2,26.54 74.8,24 80.65,19.68 77.09,17.65 68.83,24.64 63.12,7.49 79.63,7.49 83.44,11.3 68.2,7.49 74.55,7.49 81.53,14.48 77.98,22.48 76.84,26.67 76.71,15.49 77.98,23.88 63.12,22.1 64.39,17.02 72.01,18.67 68.2,17.65 73.41,24.89 75.95,25.15 74.3,25.78 59.31,11.3
  pour Top (isolate 0.127): 58.67,6.86 84.07,6.86 84.07,26.92 58.67,26.92
  pour Bottom (isolate 0.127): 84.07,6.86 58.67,6.86 58.67,26.92 84.07,26.92
GND3  (via drill 0.3)  (34 unrouted)
  Top 0.203: U4.19 20.19,49.28 20.19,50.16 20.41,50.38 C7.2 | U4.19 18.92,49.28 18.92,50.16 | U4.19 18.92,48.01 18.92,47.12 18.29,46.48 v18.29,46.1 | U4.19 20.19,48.01 20.19,47.12 21.21,46.1 v22.73,46.1 | 9.78,40.13 9.78,41.5
  other vias: 10.03,52.45 23.37,52.58 16.38,52.45 22.99,49.91 28.83,45.59 25.27,43.56 17.02,50.55 11.3,33.4 27.81,33.4 31.62,37.21 16.38,33.4 22.73,33.4 29.72,40.39 26.16,48.39 25.02,52.58 24.89,41.4 26.16,49.78 11.3,48.01 12.57,42.93 20.19,44.58 16.38,43.56 21.59,50.8 24.13,51.05 22.48,51.69 7.49,37.21
  pour Top (isolate 0.127): 6.86,32.77 32.26,32.77 32.26,52.83 6.86,52.83
  pour Bottom (isolate 0.127): 32.26,32.77 6.86,32.77 6.86,52.83 32.26,52.83
GND4  (via drill 0.3)  (34 unrouted)
  Top 0.203: U5.19 46.1,49.28 46.1,50.16 46.32,50.38 C9.2 | U5.19 44.83,49.28 44.83,50.16 | U5.19 44.83,48.01 44.83,47.12 44.2,46.48 v44.2,46.1 | U5.19 46.1,48.01 46.1,47.12 47.12,46.1 v48.64,46.1 | 35.69,40.13 35.69,41.5
  other vias: 35.94,52.45 49.28,52.58 42.29,52.45 48.89,49.91 54.74,45.59 51.18,43.56 42.93,50.55 37.21,33.4 53.72,33.4 57.53,37.21 42.29,33.4 48.64,33.4 55.63,40.39 52.07,48.39 50.93,52.58 50.8,41.4 52.07,49.78 37.21,48.01 38.48,42.93 46.1,44.58 42.29,43.56 47.5,50.8 50.04,51.05 48.39,51.69 33.4,37.21
  pour Top (isolate 0.127): 32.77,32.77 58.17,32.77 58.17,52.83 32.77,52.83
  pour Bottom (isolate 0.127): 58.17,32.77 32.77,32.77 32.77,52.83 58.17,52.83
GND5  (via drill 0.3)  (34 unrouted)
  Top 0.203: U6.19 72.01,49.28 72.01,50.16 72.22,50.38 C11.2 | U6.19 70.74,49.28 70.74,50.16 | U6.19 70.74,48.01 70.74,47.12 70.1,46.48 v70.1,46.1 | U6.19 72.01,48.01 72.01,47.12 73.03,46.1 v74.55,46.1 | 61.59,40.13 61.59,41.5
  other vias: 61.85,52.45 75.18,52.58 68.2,52.45 74.8,49.91 80.65,45.59 77.09,43.56 68.83,50.55 63.12,33.4 79.63,33.4 83.44,37.21 68.2,33.4 74.55,33.4 81.53,40.39 77.98,48.39 76.84,52.58 76.71,41.4 77.98,49.78 63.12,48.01 64.39,42.93 72.01,44.58 68.2,43.56 73.41,50.8 75.95,51.05 74.3,51.69 59.31,37.21
  pour Top (isolate 0.127): 58.67,32.77 84.07,32.77 84.07,52.83 58.67,52.83
  pour Bottom (isolate 0.127): 84.07,32.77 58.67,32.77 58.67,52.83 84.07,52.83
GND6  (via drill 0.3)  (34 unrouted)
  Top 0.203: U7.19 20.19,75.18 20.19,76.07 20.41,76.29 C13.2 | U7.19 18.92,75.18 18.92,76.07 | U7.19 18.92,73.91 18.92,73.03 18.29,72.39 v18.29,72.01 | U7.19 20.19,73.91 20.19,73.03 21.21,72.01 v22.73,72.01 | 9.78,66.04 9.78,67.41
  other vias: 10.03,78.36 23.37,78.49 16.38,78.36 22.99,75.82 28.83,71.5 25.27,69.47 17.02,76.45 11.3,59.31 27.81,59.31 31.62,63.12 16.38,59.31 22.73,59.31 29.72,66.29 26.16,74.3 25.02,78.49 24.89,67.31 26.16,75.69 11.3,73.91 12.57,68.83 20.19,70.48 16.38,69.47 21.59,76.71 24.13,76.96 22.48,77.6 7.49,63.12
  pour Top (isolate 0.127): 6.86,58.67 32.26,58.67 32.26,78.74 6.86,78.74
  pour Bottom (isolate 0.127): 32.26,58.67 6.86,58.67 6.86,78.74 32.26,78.74
GND7  (via drill 0.3)  (34 unrouted)
  Top 0.203: U8.19 46.1,75.18 46.1,76.07 46.32,76.29 C15.2 | U8.19 44.83,75.18 44.83,76.07 | U8.19 44.83,73.91 44.83,73.03 44.2,72.39 v44.2,72.01 | U8.19 46.1,73.91 46.1,73.03 47.12,72.01 v48.64,72.01 | 35.69,66.04 35.69,67.41
  other vias: 35.94,78.36 49.28,78.49 42.29,78.36 48.89,75.82 54.74,71.5 51.18,69.47 42.93,76.45 37.21,59.31 53.72,59.31 57.53,63.12 42.29,59.31 48.64,59.31 55.63,66.29 52.07,74.3 50.93,78.49 50.8,67.31 52.07,75.69 37.21,73.91 38.48,68.83 46.1,70.48 42.29,69.47 47.5,76.71 50.04,76.96 48.39,77.6 33.4,63.12
  pour Top (isolate 0.127): 32.77,58.67 58.17,58.67 58.17,78.74 32.77,78.74
  pour Bottom (isolate 0.127): 58.17,58.67 32.77,58.67 32.77,78.74 58.17,78.74
GND8  (via drill 0.3)  (34 unrouted)
  Top 0.203: U9.19 72.01,75.18 72.01,76.07 72.22,76.29 C17.2 | U9.19 70.74,75.18 70.74,76.07 | U9.19 70.74,73.91 70.74,73.03 70.1,72.39 v70.1,72.01 | U9.19 72.01,73.91 72.01,73.03 73.03,72.01 v74.55,72.01 | 61.59,66.04 61.59,67.41
  other vias: 61.85,78.36 75.18,78.49 68.2,78.36 74.8,75.82 80.65,71.5 77.09,69.47 68.83,76.45 63.12,59.31 79.63,59.31 83.44,63.12 68.2,59.31 74.55,59.31 81.53,66.29 77.98,74.3 76.84,78.49 76.71,67.31 77.98,75.69 63.12,73.91 64.39,68.83 72.01,70.48 68.2,69.47 73.41,76.71 75.95,76.96 74.3,77.6 59.31,63.12
  pour Top (isolate 0.127): 58.67,58.67 84.07,58.67 84.07,78.74 58.67,78.74
  pour Bottom (isolate 0.127): 84.07,58.67 58.67,58.67 58.67,78.74 84.07,78.74
IO1  (via drill 0.3)
  Top 0.203: U2.12 48.75,22.33 v48.77,22.35
  Bottom 0.203: v48.77,22.35 44.7,18.29 J5.4
IO2
  Top 0.203: U2.5 43.13,22.33 42.29,21.5 42.29,20.38 41.08,19.18 35.69,19.18 J5.3
IO3
  Top 0.203: U2.4 42.99,22.73 41.91,21.66 41.91,20.54 40.92,19.56 36.58,19.56 35.31,20.83 35.31,22.1 J5.2
IO4  (via drill 0.3)
  Top 0.203: U1.12 22.84,22.33 v22.86,22.35
  Bottom 0.203: v22.86,22.35 18.8,18.29 J2.4
IO5
  Top 0.203: U1.5 17.22,22.33 16.38,21.5 16.38,20.38 15.18,19.18 9.78,19.18 J2.3
IO6
  Top 0.203: U1.4 17.08,22.73 16,21.66 16,20.54 15.02,19.56 10.67,19.56 9.4,20.83 9.4,22.1 J2.2
IO7
  Top 0.203: U1.3 16.94,23.13 15.62,21.81 15.62,20.7 14.86,19.94 11.56,19.94 10.67,20.83 10.67,23.37 J2.1
IO8
  Top 0.203: U2.3 42.85,23.13 41.53,21.81 41.53,20.7 40.77,19.94 37.46,19.94 36.58,20.83 36.58,23.37 J5.1
IO9  (via drill 0.3)
  Top 0.203: U3.12 74.66,22.33 v74.68,22.35
  Bottom 0.203: v74.68,22.35 70.61,18.29 J8.4
IO10
  Top 0.203: U3.5 69.03,22.33 68.2,21.5 68.2,20.38 66.99,19.18 61.59,19.18 J8.3
IO11
  Top 0.203: U3.4 68.9,22.73 67.82,21.66 67.82,20.54 66.83,19.56 62.48,19.56 61.21,20.83 61.21,22.1 J8.2
IO12
  Top 0.203: U3.3 68.76,23.13 67.44,21.81 67.44,20.7 66.67,19.94 63.37,19.94 62.48,20.83 62.48,23.37 J8.1
IO13  (via drill 0.3)
  Top 0.203: U4.12 22.84,48.24 v22.86,48.26
  Bottom 0.203: v22.86,48.26 18.8,44.2 J11.4
IO14
  Top 0.203: U4.5 17.22,48.24 16.38,47.41 16.38,46.29 15.18,45.08 9.78,45.08 J11.3
IO15
  Top 0.203: U4.4 17.08,48.64 16,47.56 16,46.45 15.02,45.47 10.67,45.47 9.4,46.74 9.4,48.01 J11.2
IO16
  Top 0.203: U4.3 16.94,49.04 15.62,47.72 15.62,46.61 14.86,45.85 11.56,45.85 10.67,46.74 10.67,49.28 J11.1
IO17  (via drill 0.3)
  Top 0.203: U5.12 48.75,48.24 v48.77,48.26
  Bottom 0.203: v48.77,48.26 44.7,44.2 J14.4
IO18
  Top 0.203: U5.5 43.13,48.24 42.29,47.41 42.29,46.29 41.08,45.08 35.69,45.08 J14.3
IO19
  Top 0.203: U5.4 42.99,48.64 41.91,47.56 41.91,46.45 40.92,45.47 36.58,45.47 35.31,46.74 35.31,48.01 J14.2
IO20
  Top 0.203: U5.3 42.85,49.04 41.53,47.72 41.53,46.61 40.77,45.85 37.46,45.85 36.58,46.74 36.58,49.28 J14.1
IO21  (via drill 0.3)
  Top 0.203: U6.12 74.66,48.24 v74.68,48.26
  Bottom 0.203: v74.68,48.26 70.61,44.2 J17.4
IO22
  Top 0.203: U6.5 69.03,48.24 68.2,47.41 68.2,46.29 66.99,45.08 61.59,45.08 J17.3
IO23
  Top 0.203: U6.4 68.9,48.64 67.82,47.56 67.82,46.45 66.83,45.47 62.48,45.47 61.21,46.74 61.21,48.01 J17.2
IO24
  Top 0.203: U6.3 68.76,49.04 67.44,47.72 67.44,46.61 66.67,45.85 63.37,45.85 62.48,46.74 62.48,49.28 J17.1
IO25  (via drill 0.3)
  Top 0.203: U7.12 22.84,74.15 v22.86,74.17
  Bottom 0.203: v22.86,74.17 18.8,70.1 J20.4
IO26
  Top 0.203: U7.5 17.22,74.15 16.38,73.31 16.38,72.2 15.18,70.99 9.78,70.99 J20.3
IO27
  Top 0.203: U7.4 17.08,74.55 16,73.47 16,72.36 15.02,71.37 10.67,71.37 9.4,72.64 9.4,73.91 J20.2
IO28
  Top 0.203: U7.3 16.94,74.95 15.62,73.63 15.62,72.52 14.86,71.76 11.56,71.76 10.67,72.64 10.67,75.18 J20.1
IO29  (via drill 0.3)
  Top 0.203: U8.12 48.75,74.15 v48.77,74.17
  Bottom 0.203: v48.77,74.17 44.7,70.1 J23.4
IO30
  Top 0.203: U8.5 43.13,74.15 42.29,73.31 42.29,72.2 41.08,70.99 35.69,70.99 J23.3
IO31
  Top 0.203: U8.4 42.99,74.55 41.91,73.47 41.91,72.36 40.92,71.37 36.58,71.37 35.31,72.64 35.31,73.91 J23.2
IO32
  Top 0.203: U8.3 42.85,74.95 41.53,73.63 41.53,72.52 40.77,71.76 37.46,71.76 36.58,72.64 36.58,75.18 J23.1
IO33  (via drill 0.3)
  Top 0.203: U9.12 74.66,74.15 v74.68,74.17
  Bottom 0.203: v74.68,74.17 70.61,70.1 J26.4
IO34
  Top 0.203: U9.5 69.03,74.15 68.2,73.31 68.2,72.2 66.99,70.99 61.59,70.99 J26.3
IO35
  Top 0.203: U9.4 68.9,74.55 67.82,73.47 67.82,72.36 66.83,71.37 62.48,71.37 61.21,72.64 61.21,73.91 J26.2
IO36
  Top 0.203: U9.3 68.76,74.95 67.44,73.63 67.44,72.52 66.67,71.76 63.37,71.76 62.48,72.64 62.48,75.18 J26.1
N$1
  Top 0.203: U1.1 17.98,23.93 17.93,23.98
  Top 0.254: Y1.3 12.36,23.17 13.43,22.1 14.7,22.1 16.59,23.98 17.93,23.98
N$2
  Top 0.203: U1.2 17.85,23.53 17.84,23.55
  Top 0.254: 17.84,23.55 16.76,23.55 15.21,22 15.21,21.31 14.9,21 Y1.1
N$3  (via drill 0.3)
  Top 0.203: v21.72,22.99 21.46,22.73 U1.13
  Bottom 0.203: v21.72,22.99 21.46,22.73 VDDQ.1
N$4
  Top 0.203: 21.77,23.93 U1.16
  Top 0.508: E1.ANT 24.26,26.42 21.77,23.93
N$5  (via drill 0.3)
  Top 0.203: D1.C 24.38,16.51 v24.02,16.14
  Bottom 0.203: v24.02,16.14 23.14,17.02 PWR.2
N$6
  Top 0.203: R1.1 26.79,18.16 D1.A
N$7
  Top 0.203: 47.68,23.93 U2.16
  Top 0.508: E2.ANT 50.16,26.42 47.68,23.93
N$8
  Top 0.203: U2.1 43.89,23.93 43.84,23.98
  Top 0.254: Y2.3 38.27,23.17 39.34,22.1 40.61,22.1 42.5,23.98 43.84,23.98
N$9
  Top 0.203: U2.2 43.76,23.53 43.75,23.55
  Top 0.254: 43.75,23.55 42.67,23.55 41.12,22 41.12,21.31 40.81,21 Y2.1
N$10  (via drill 0.3)
  Top 0.203: v47.62,22.99 47.37,22.73 U2.13
  Bottom 0.203: v47.62,22.99 47.37,22.73 VDDQ1.1
N$11  (via drill 0.3)
  Top 0.203: D2.C 50.29,16.51 v49.92,16.14
  Bottom 0.203: v49.92,16.14 49.05,17.02 PWR1.2
N$12
  Top 0.203: R2.1 52.69,18.16 D2.A
N$13
  Top 0.203: 73.59,23.93 U3.16
  Top 0.508: E3.ANT 76.07,26.42 73.59,23.93
N$14
  Top 0.203: U3.1 69.8,23.93 69.74,23.98
  Top 0.254: Y3.3 64.17,23.17 65.25,22.1 66.52,22.1 68.41,23.98 69.74,23.98
N$15
  Top 0.203: U3.2 69.67,23.53 69.66,23.55
  Top 0.254: 69.66,23.55 68.58,23.55 67.03,22 67.03,21.31 66.72,21 Y3.1
N$16  (via drill 0.3)
  Top 0.203: v73.53,22.99 73.28,22.73 U3.13
  Bottom 0.203: v73.53,22.99 73.28,22.73 VDDQ2.1
N$17  (via drill 0.3)
  Top 0.203: D3.C 76.2,16.51 v75.83,16.14
  Bottom 0.203: v75.83,16.14 74.95,17.02 PWR2.2
N$18
  Top 0.203: R3.1 78.6,18.16 D3.A
N$19
  Top 0.203: 21.77,49.84 U4.16
  Top 0.508: E4.ANT 24.26,52.32 21.77,49.84
N$20
  Top 0.203: U4.1 17.98,49.84 17.93,49.89
  Top 0.254: Y4.3 12.36,49.08 13.43,48.01 14.7,48.01 16.59,49.89 17.93,49.89
N$21
  Top 0.203: U4.2 17.85,49.44 17.84,49.45
  Top 0.254: 17.84,49.45 16.76,49.45 15.21,47.9 15.21,47.22 14.9,46.91 Y4.1
N$22  (via drill 0.3)
  Top 0.203: v21.72,48.89 21.46,48.64 U4.13
  Bottom 0.203: v21.72,48.89 21.46,48.64 VDDQ3.1
N$23  (via drill 0.3)
  Top 0.203: D4.C 24.38,42.42 v24.02,42.05
  Bottom 0.203: v24.02,42.05 23.14,42.93 PWR3.2
N$24
  Top 0.203: R4.1 26.79,44.07 D4.A
N$25
  Top 0.203: 47.68,49.84 U5.16
  Top 0.508: E5.ANT 50.16,52.32 47.68,49.84
N$26
  Top 0.203: U5.1 43.89,49.84 43.84,49.89
  Top 0.254: Y5.3 38.27,49.08 39.34,48.01 40.61,48.01 42.5,49.89 43.84,49.89
N$27
  Top 0.203: U5.2 43.76,49.44 43.75,49.45
  Top 0.254: 43.75,49.45 42.67,49.45 41.12,47.9 41.12,47.22 40.81,46.91 Y5.1
N$28  (via drill 0.3)
  Top 0.203: v47.62,48.89 47.37,48.64 U5.13
  Bottom 0.203: v47.62,48.89 47.37,48.64 VDDQ4.1
N$29  (via drill 0.3)
  Top 0.203: D5.C 50.29,42.42 v49.92,42.05
  Bottom 0.203: v49.92,42.05 49.05,42.93 PWR4.2
N$30
  Top 0.203: R5.1 52.69,44.07 D5.A
N$31
  Top 0.203: 73.59,49.84 U6.16
  Top 0.508: E6.ANT 76.07,52.32 73.59,49.84
N$32
  Top 0.203: U6.1 69.8,49.84 69.74,49.89
  Top 0.254: Y6.3 64.17,49.08 65.25,48.01 66.52,48.01 68.41,49.89 69.74,49.89
N$33
  Top 0.203: U6.2 69.67,49.44 69.66,49.45
  Top 0.254: 69.66,49.45 68.58,49.45 67.03,47.9 67.03,47.22 66.72,46.91 Y6.1
N$34  (via drill 0.3)
  Top 0.203: v73.53,48.89 73.28,48.64 U6.13
  Bottom 0.203: v73.53,48.89 73.28,48.64 VDDQ5.1
N$35  (via drill 0.3)
  Top 0.203: D6.C 76.2,42.42 v75.83,42.05
  Bottom 0.203: v75.83,42.05 74.95,42.93 PWR5.2
N$36
  Top 0.203: R6.1 78.6,44.07 D6.A
N$37
  Top 0.203: 21.77,75.75 U7.16
  Top 0.508: E7.ANT 24.26,78.23 21.77,75.75
N$38
  Top 0.203: U7.1 17.98,75.75 17.93,75.8
  Top 0.254: Y7.3 12.36,74.99 13.43,73.91 14.7,73.91 16.59,75.8 17.93,75.8
N$39
  Top 0.203: U7.2 17.85,75.35 17.84,75.36
  Top 0.254: 17.84,75.36 16.76,75.36 15.21,73.81 15.21,73.13 14.9,72.81 Y7.1
N$40  (via drill 0.3)
  Top 0.203: v21.72,74.8 21.46,74.55 U7.13
  Bottom 0.203: v21.72,74.8 21.46,74.55 VDDQ6.1
N$41  (via drill 0.3)
  Top 0.203: D7.C 24.38,68.33 v24.02,67.96
  Bottom 0.203: v24.02,67.96 23.14,68.83 PWR6.2
N$42
  Top 0.203: R7.1 26.79,69.98 D7.A
N$43
  Top 0.203: 47.68,75.75 U8.16
  Top 0.508: E8.ANT 50.16,78.23 47.68,75.75
N$44
  Top 0.203: U8.1 43.89,75.75 43.84,75.8
  Top 0.254: Y8.3 38.27,74.99 39.34,73.91 40.61,73.91 42.5,75.8 43.84,75.8
N$45
  Top 0.203: U8.2 43.76,75.35 43.75,75.36
  Top 0.254: 43.75,75.36 42.67,75.36 41.12,73.81 41.12,73.13 40.81,72.81 Y8.1
N$46  (via drill 0.3)
  Top 0.203: v47.62,74.8 47.37,74.55 U8.13
  Bottom 0.203: v47.62,74.8 47.37,74.55 VDDQ7.1
N$47  (via drill 0.3)
  Top 0.203: D8.C 50.29,68.33 v49.92,67.96
  Bottom 0.203: v49.92,67.96 49.05,68.83 PWR7.2
N$48
  Top 0.203: R8.1 52.69,69.98 D8.A
N$49
  Top 0.203: 73.59,75.75 U9.16
  Top 0.508: E9.ANT 76.07,78.23 73.59,75.75
N$50
  Top 0.203: U9.1 69.8,75.75 69.74,75.8
  Top 0.254: Y9.3 64.17,74.99 65.25,73.91 66.52,73.91 68.41,75.8 69.74,75.8
N$51
  Top 0.203: U9.2 69.67,75.35 69.66,75.36
  Top 0.254: 69.66,75.36 68.58,75.36 67.03,73.81 67.03,73.13 66.72,72.81 Y9.1
N$52  (via drill 0.3)
  Top 0.203: v73.53,74.8 73.28,74.55 U9.13
  Bottom 0.203: v73.53,74.8 73.28,74.55 VDDQ8.1
N$53  (via drill 0.3)
  Top 0.203: D9.C 76.2,68.33 v75.83,67.96
  Bottom 0.203: v75.83,67.96 74.95,68.83 PWR8.2
N$54
  Top 0.203: R9.1 78.6,69.98 D9.A
RX/IO0  (via drill 0.3)
  Top 0.203: v24.64,18.92 20.83,18.92 19.31,20.44 U1.8
  Bottom 0.203: J1.3 25.27,18.29 v24.64,18.92
RX/IO1  (via drill 0.3)
  Top 0.203: v50.55,18.92 46.74,18.92 45.22,20.44 U2.8
  Bottom 0.203: J4.3 51.18,18.29 v50.55,18.92
RX/IO2  (via drill 0.3)
  Top 0.203: v76.45,18.92 72.64,18.92 71.12,20.44 U3.8
  Bottom 0.203: J7.3 77.09,18.29 v76.45,18.92
RX/IO3  (via drill 0.3)
  Top 0.203: v24.64,44.83 20.83,44.83 19.31,46.35 U4.8
  Bottom 0.203: J10.3 25.27,44.2 v24.64,44.83
RX/IO4  (via drill 0.3)
  Top 0.203: v50.55,44.83 46.74,44.83 45.22,46.35 U5.8
  Bottom 0.203: J13.3 51.18,44.2 v50.55,44.83
RX/IO5  (via drill 0.3)
  Top 0.203: v76.45,44.83 72.64,44.83 71.12,46.35 U6.8
  Bottom 0.203: J16.3 77.09,44.2 v76.45,44.83
RX/IO6  (via drill 0.3)
  Top 0.203: v24.64,70.74 20.83,70.74 19.31,72.26 U7.8
  Bottom 0.203: J19.3 25.27,70.1 v24.64,70.74
RX/IO7  (via drill 0.3)
  Top 0.203: v50.55,70.74 46.74,70.74 45.22,72.26 U8.8
  Bottom 0.203: J22.3 51.18,70.1 v50.55,70.74
RX/IO8  (via drill 0.3)
  Top 0.203: v76.45,70.74 72.64,70.74 71.12,72.26 U9.8
  Bottom 0.203: J25.3 77.09,70.1 v76.45,70.74
SCL/IO1
  Top 0.203: J6.4 47.88,21.21 47.55,21.53 U2.10
SCL/IO2
  Top 0.203: J3.4 21.97,21.21 21.64,21.53 U1.10
SCL/IO3
  Top 0.203: J9.4 73.78,21.21 73.46,21.53 U3.10
SCL/IO4
  Top 0.203: J12.4 21.97,47.12 21.64,47.44 U4.10
SCL/IO5
  Top 0.203: J15.4 47.88,47.12 47.55,47.44 U5.10
SCL/IO6
  Top 0.203: J18.4 73.78,47.12 73.46,47.44 U6.10
SCL/IO7
  Top 0.203: J21.4 21.97,73.03 21.64,73.35 U7.10
SCL/IO8
  Top 0.203: J24.4 47.88,73.03 47.55,73.35 U8.10
SCL/IO9
  Top 0.203: J27.4 73.78,73.03 73.46,73.35 U9.10
SDA/IO1
  Top 0.203: U2.11 48.19,21.93 48.44,21.68 49.11,21.68 49.64,22.21 J6.3
SDA/IO2
  Top 0.203: U3.11 74.1,21.93 74.35,21.68 75.02,21.68 75.55,22.21 J9.3
SDA/IO3
  Top 0.203: U1.11 22.28,21.93 22.53,21.68 23.2,21.68 23.73,22.21 J3.3
SDA/IO4
  Top 0.203: U4.11 22.28,47.84 22.53,47.59 23.2,47.59 23.73,48.12 J12.3
SDA/IO5
  Top 0.203: U5.11 48.19,47.84 48.44,47.59 49.11,47.59 49.64,48.12 J15.3
SDA/IO6
  Top 0.203: U6.11 74.1,47.84 74.35,47.59 75.02,47.59 75.55,48.12 J18.3
SDA/IO7
  Top 0.203: U7.11 22.28,73.75 22.53,73.5 23.2,73.5 23.73,74.03 J21.3
SDA/IO8
  Top 0.203: U8.11 48.19,73.75 48.44,73.5 49.11,73.5 49.64,74.03 J24.3
SDA/IO9
  Top 0.203: U9.11 74.1,73.75 74.35,73.5 75.02,73.5 75.55,74.03 J27.3
SW0
  Top 0.203: U1.6 17.36,21.93 16.76,21.34 16.76,20.23 15.33,18.8 11.18,18.8 J2.5
SW1
  Top 0.203: U1.7 17.5,21.53 17.14,21.18 17.14,20.07 15.49,18.41 12.06,18.41 9.4,15.75 9.4,14.48 J2.6
SW2
  Top 0.203: U2.6 43.26,21.93 42.67,21.34 42.67,20.23 41.24,18.8 37.08,18.8 J5.5
SW3
  Top 0.203: U2.7 43.4,21.53 43.05,21.18 43.05,20.07 41.4,18.41 37.97,18.41 35.31,15.75 35.31,14.48 J5.6
SW4
  Top 0.203: U3.6 69.17,21.93 68.58,21.34 68.58,20.23 67.15,18.8 62.99,18.8 J8.5
SW5
  Top 0.203: U3.7 69.31,21.53 68.96,21.18 68.96,20.07 67.31,18.41 63.88,18.41 61.21,15.75 61.21,14.48 J8.6
SW6
  Top 0.203: U4.6 17.36,47.84 16.76,47.25 16.76,46.14 15.33,44.7 11.18,44.7 J11.5
SW7
  Top 0.203: U4.7 17.5,47.44 17.14,47.09 17.14,45.98 15.49,44.32 12.06,44.32 9.4,41.66 9.4,40.39 J11.6
SW8
  Top 0.203: U5.6 43.26,47.84 42.67,47.25 42.67,46.14 41.24,44.7 37.08,44.7 J14.5
SW9
  Top 0.203: U5.7 43.4,47.44 43.05,47.09 43.05,45.98 41.4,44.32 37.97,44.32 35.31,41.66 35.31,40.39 J14.6
SW10
  Top 0.203: U6.6 69.17,47.84 68.58,47.25 68.58,46.14 67.15,44.7 62.99,44.7 J17.5
SW11
  Top 0.203: U6.7 69.31,47.44 68.96,47.09 68.96,45.98 67.31,44.32 63.88,44.32 61.21,41.66 61.21,40.39 J17.6
SW12
  Top 0.203: U7.6 17.36,73.75 16.76,73.16 16.76,72.04 15.33,70.61 11.18,70.61 J20.5
SW13
  Top 0.203: U7.7 17.5,73.35 17.14,73 17.14,71.89 15.49,70.23 12.06,70.23 9.4,67.56 9.4,66.29 J20.6
SW14
  Top 0.203: U8.6 43.26,73.75 42.67,73.16 42.67,72.04 41.24,70.61 37.08,70.61 J23.5
SW15
  Top 0.203: U8.7 43.4,73.35 43.05,73 43.05,71.89 41.4,70.23 37.97,70.23 35.31,67.56 35.31,66.29 J23.6
SW16
  Top 0.203: U9.6 69.17,73.75 68.58,73.16 68.58,72.04 67.15,70.61 62.99,70.61 J26.5
SW17
  Top 0.203: U9.7 69.31,73.35 68.96,73 68.96,71.89 67.31,70.23 63.88,70.23 61.21,67.56 61.21,66.29 J26.6
TX/IO1  (via drill 0.3)
  Top 0.203: v22.1,19.56 20.83,19.56 19.81,20.58 U1.9
  Bottom 0.203: J1.2 25.91,15.75 v22.1,19.56
TX/IO2  (via drill 0.3)
  Top 0.203: v48.01,19.56 46.74,19.56 45.72,20.58 U2.9
  Bottom 0.203: J4.2 51.82,15.75 v48.01,19.56
TX/IO3  (via drill 0.3)
  Top 0.203: v73.91,19.56 72.64,19.56 71.62,20.58 U3.9
  Bottom 0.203: J7.2 77.72,15.75 v73.91,19.56
TX/IO4  (via drill 0.3)
  Top 0.203: v22.1,45.47 20.83,45.47 19.81,46.49 U4.9
  Bottom 0.203: J10.2 25.91,41.66 v22.1,45.47
TX/IO5  (via drill 0.3)
  Top 0.203: v48.01,45.47 46.74,45.47 45.72,46.49 U5.9
  Bottom 0.203: J13.2 51.82,41.66 v48.01,45.47
TX/IO6  (via drill 0.3)
  Top 0.203: v73.91,45.47 72.64,45.47 71.62,46.49 U6.9
  Bottom 0.203: J16.2 77.72,41.66 v73.91,45.47
TX/IO7  (via drill 0.3)
  Top 0.203: v22.1,71.37 20.83,71.37 19.81,72.39 U7.9
  Bottom 0.203: J19.2 25.91,67.56 v22.1,71.37
TX/IO8  (via drill 0.3)
  Top 0.203: v48.01,71.37 46.74,71.37 45.72,72.39 U8.9
  Bottom 0.203: J22.2 51.82,67.56 v48.01,71.37
TX/IO9  (via drill 0.3)
  Top 0.203: v73.91,71.37 72.64,71.37 71.62,72.39 U9.9
  Bottom 0.203: J25.2 77.72,67.56 v73.91,71.37
VCC  (via drill 0.3)
  Top 0.203: U1.17 U1.18 19.31,24.67 C1.1 v16.38,25.27 C2.1 | v22.61,23.24 22.64,23.21 J3.2 28.61,23.21 J1.4 28.45,18.29 28.57,18.16 | BT1.PWR@1 29.72,16.13 29.72,17.02 28.57,18.16 | 28.57,18.16 R1.2
  Bottom 0.203: v16.38,25.27 16.38,24 17.65,22.73 VDDQ.2 19.04,21.35 19.56,20.83 20.45,20.83 22.61,22.99 v22.61,23.24
VCC1  (via drill 0.3)
  Top 0.203: U2.17 U2.18 45.22,24.67 C3.1 v42.29,25.27 C4.1 | v48.51,23.24 48.54,23.21 J6.2 54.51,23.21 J4.4 54.36,18.29 54.48,18.16 | BT2.PWR@1 55.63,16.13 55.63,17.02 54.48,18.16 | 54.48,18.16 R2.2
  Bottom 0.203: v42.29,25.27 42.29,24 43.56,22.73 VDDQ1.2 44.95,21.35 45.47,20.83 46.35,20.83 48.51,22.99 v48.51,23.24
VCC2  (via drill 0.3)
  Top 0.203: U3.17 U3.18 71.12,24.67 C5.1 v68.2,25.27 C6.1 | v74.42,23.24 74.45,23.21 J9.2 80.42,23.21 J7.4 80.26,18.29 80.39,18.16 | BT3.PWR@1 81.53,16.13 81.53,17.02 80.39,18.16 | 80.39,18.16 R3.2
  Bottom 0.203: v68.2,25.27 68.2,24 69.47,22.73 VDDQ2.2 70.85,21.35 71.37,20.83 72.26,20.83 74.42,22.99 v74.42,23.24
VCC3  (via drill 0.3)
  Top 0.203: U4.17 U4.18 19.31,50.58 C7.1 v16.38,51.18 C8.1 | v22.61,49.15 22.64,49.12 J12.2 28.61,49.12 J10.4 28.45,44.2 28.57,44.07 | BT4.PWR@1 29.72,42.04 29.72,42.93 28.57,44.07 | 28.57,44.07 R4.2
  Bottom 0.203: v16.38,51.18 16.38,49.91 17.65,48.64 VDDQ3.2 19.04,47.26 19.56,46.74 20.45,46.74 22.61,48.89 v22.61,49.15
VCC4  (via drill 0.3)
  Top 0.203: U5.17 U5.18 45.22,50.58 C9.1 v42.29,51.18 C10.1 | v48.51,49.15 48.54,49.12 J15.2 54.51,49.12 J13.4 54.36,44.2 54.48,44.07 | BT5.PWR@1 55.63,42.04 55.63,42.93 54.48,44.07 | 54.48,44.07 R5.2
  Bottom 0.203: v42.29,51.18 42.29,49.91 43.56,48.64 VDDQ4.2 44.95,47.26 45.47,46.74 46.35,46.74 48.51,48.89 v48.51,49.15
VCC5  (via drill 0.3)
  Top 0.203: U6.17 U6.18 71.12,50.58 C11.1 v68.2,51.18 C12.1 | v74.42,49.15 74.45,49.12 J18.2 80.42,49.12 J16.4 80.26,44.2 80.39,44.07 | BT6.PWR@1 81.53,42.04 81.53,42.93 80.39,44.07 | 80.39,44.07 R6.2
  Bottom 0.203: v68.2,51.18 68.2,49.91 69.47,48.64 VDDQ5.2 70.85,47.26 71.37,46.74 72.26,46.74 74.42,48.89 v74.42,49.15
VCC6  (via drill 0.3)
  Top 0.203: U7.17 U7.18 19.31,76.49 C13.1 v16.38,77.09 C14.1 | v22.61,75.06 22.64,75.03 J21.2 28.61,75.03 J19.4 28.45,70.1 28.57,69.98 | BT7.PWR@1 29.72,67.95 29.72,68.83 28.57,69.98 | 28.57,69.98 R7.2
  Bottom 0.203: v16.38,77.09 16.38,75.82 17.65,74.55 VDDQ6.2 19.04,73.17 19.56,72.64 20.45,72.64 22.61,74.8 v22.61,75.06
VCC7  (via drill 0.3)
  Top 0.203: U8.17 U8.18 45.22,76.49 C15.1 v42.29,77.09 C16.1 | v48.51,75.06 48.54,75.03 J24.2 54.51,75.03 J22.4 54.36,70.1 54.48,69.98 | BT8.PWR@1 55.63,67.95 55.63,68.83 54.48,69.98 | 54.48,69.98 R8.2
  Bottom 0.203: v42.29,77.09 42.29,75.82 43.56,74.55 VDDQ7.2 44.95,73.17 45.47,72.64 46.35,72.64 48.51,74.8 v48.51,75.06
VCC8  (via drill 0.3)
  Top 0.203: U9.17 U9.18 71.12,76.49 C17.1 v68.2,77.09 C18.1 | v74.42,75.06 74.45,75.03 J27.2 80.42,75.03 J25.4 80.26,70.1 80.39,69.98 | BT9.PWR@1 81.53,67.95 81.53,68.83 80.39,69.98 | 80.39,69.98 R9.2
  Bottom 0.203: v68.2,77.09 68.2,75.82 69.47,74.55 VDDQ8.2 70.85,73.17 71.37,72.64 72.26,72.64 74.42,74.8 v74.42,75.06

## Text on the board
Bottom: v01 | v01 | v01 | v01 | v01 | v01 | v01 | v01 | v01
Milling: v-score | v-score | v-score | v-score | v-score | v-score | v-score | v-score